# Altium PCB ECG.PcbDoc
Units mil, origin at the board's own origin, x right, y up, seen from the top; angles counter-clockwise.
Board outline 2530 x 835 mil, 2 copper layers (Top Layer, GND); 21 components, 19 nets, 64 pads, 2 vias.
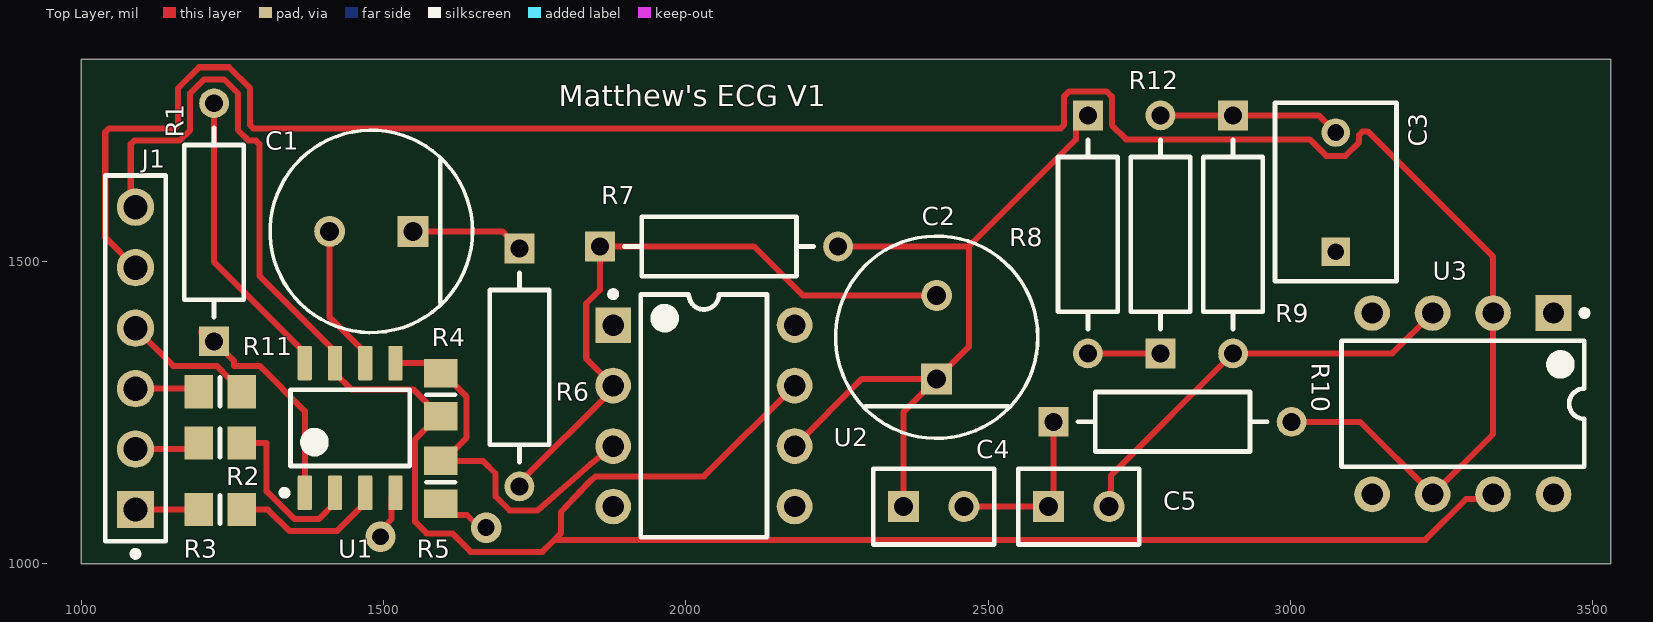
[diagram p0: Top Layer view]
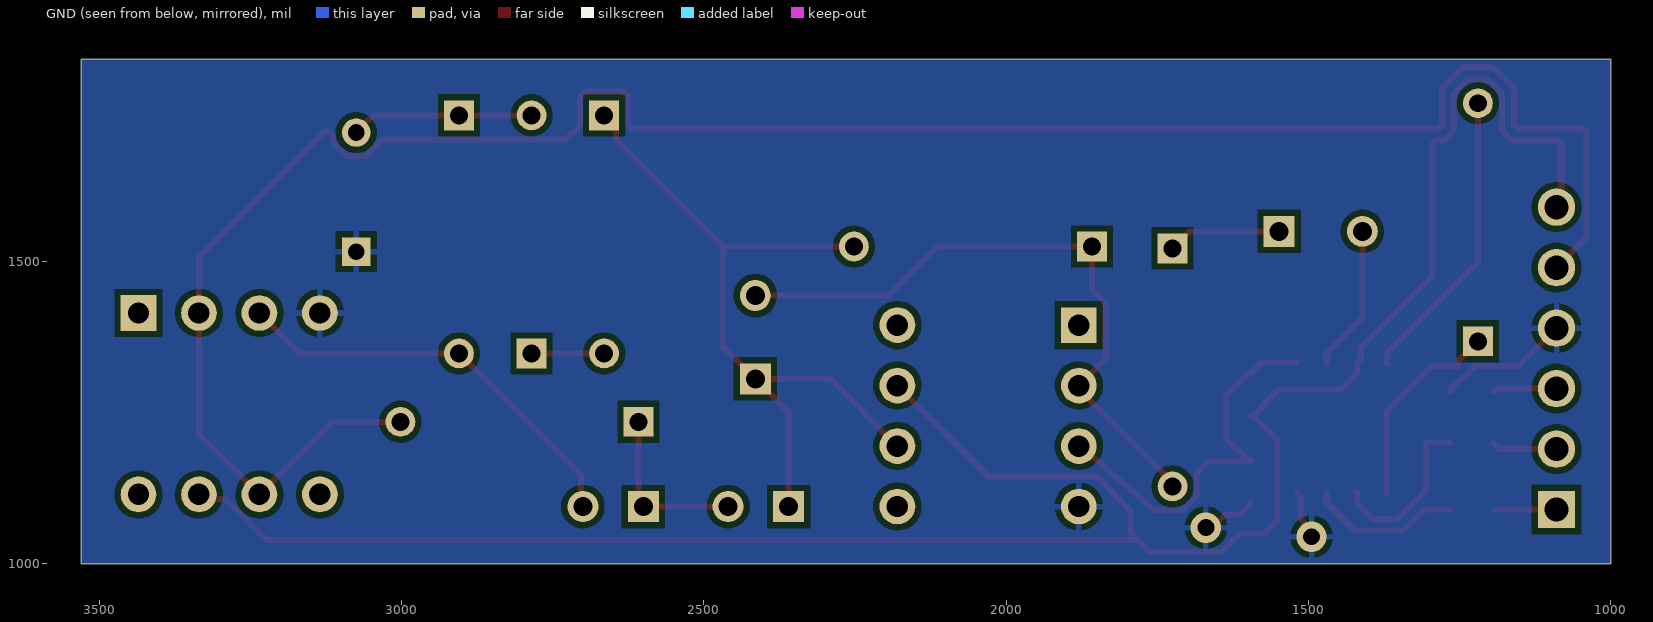
[diagram p1: GND view, seen from below]
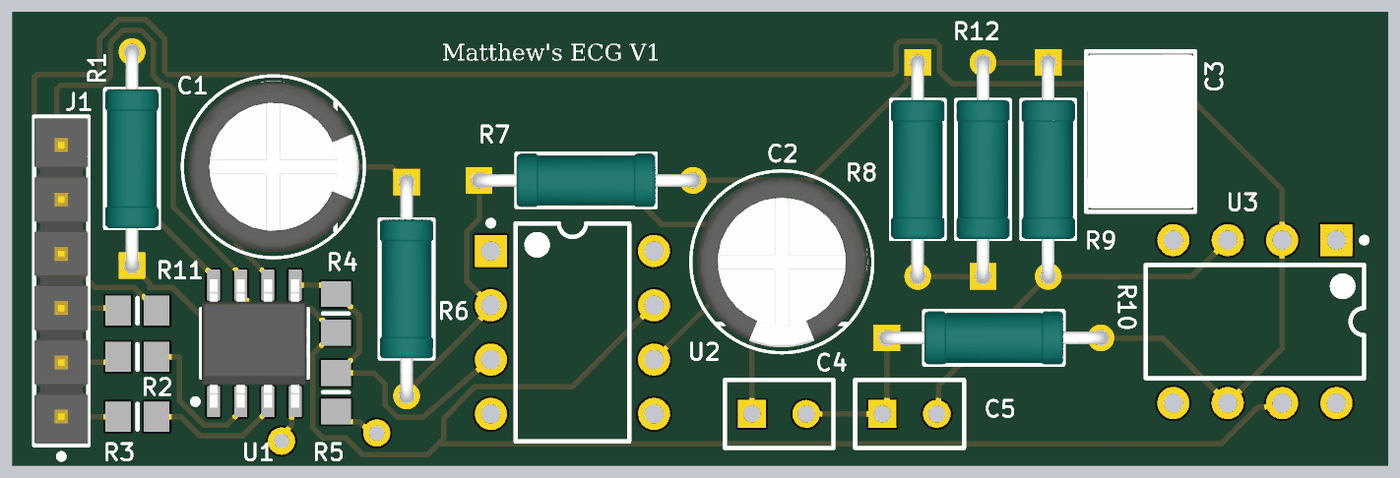
[diagram p2: 3D render of the assembled board from above, using the file's embedded part models]

## Layer stack, top to bottom
Top Solder: solder mask 0.4, Solder Resist, Dk 3.5
Top Layer: signal copper 1.4
Dielectric 1: dielectric 12.6, FR-4, Dk 4.8
GND: signal copper 1.4
Bottom Solder: solder mask 0.4, Solder Resist, Dk 3.5

## Board outline
1000,1000 3530,1000 3530,1835 1000,1835

## Design rules (kind name [scope] priority, off if disabled: settings)
Clearance [All] p1: gap=10 ignorepadtopadclearanceinfootprint=FALSE except(0: Arc-Hole Track-Hole SMDPad-Hole THPad-Hole Via-Hole Fill-Hole Poly-Hole Region-Hole Text-Hole)
PolygonConnect [All] p1: connectstyle=Relief reliefconductorwidth=10 reliefentries=4 polygonreliefangle="90 Angle" airgapwidth=10
RoutingVias [All] p1: holewidth=28 width=50 viastyle="Through Hole" minholewidth=28 minwidth=50 maxholewidth=28 maxwidth=50
SolderMaskExpansion [All] p1: expansion=4 istentingtop=FALSE
Width [All] p1: maxlimit=10 minlimit=10 preferedwidth=10
30 further rules are at their usual default settings.

## Components (designator, comment, footprint, x,y, rotation, side; value= is the part's Value field where it differs from the comment)
C1 "47u" FP-RAD-TH-D_8_0_5-L_20_2-MFG 1480,1550 r180 top
C2 "47u" FP-RAD-TH-D_8_0_5-L_20_2-MFG 2415,1375 r90 top
C3 "200n" FP-R82DC4100DQ60J-MFG 3075,1615 r90 top
C4 "100n" CAPR51-254-508X318X736 2410,1095 r0 top locked
C5 "100n" CAPR51-254-508X318X736 2650,1095 r0 top locked
J1 "HTSW-106-07-G-S" FP-HTSW-106-07-G-S-MFG 1090,1340 r90 top
R1 "2000" FP-MRS25-MFG 1220,1565 r90 top
R2 "Res 0805" 6-0805_N 1230,1200 r0 top value=100k
R3 "Res 0805" 6-0805_N 1230,1090 r0 top value=100k
R4 "Res 0805" 6-0805_N 1595,1280 r270 top value=10k
R5 "Res 0805" 6-0805_N 1595,1135 r90 top value=10k
R6 "100k" FP-MRS25-MFG 1725,1325 r270 top
R7 "100k" FP-MRS25-MFG 2055,1525 r0 top
R8 "1.655k" FP-MRS25-MFG 2665,1545 r270 top
R9 "424k" FP-MRS25-MFG 2905,1545 r270 top
R10 "1.655k" FP-MRS25-MFG 2805,1235 r0 top
R11 "Res 0805" 6-0805_N 1230,1285 r0 top value=100k
R12 "1.655k" FP-MRS25-MFG 2785,1545 r90 top
U1 "INA126UA/2K5" D0008A_N 1445,1225 r90 top
U2 "LM741CN" P0008A 2030,1245 r0 top locked
U3 "LM741CN/NOPB" P0008A 3285,1265 r270 top locked

## Footprints (in the part's own frame and the unit in brackets; to place one, negate y for a bottom-side part, rotate by r counter-clockwise, add the part's x,y. Pads: shape width x height; smd on the part's side, far side on the other; paste and mask are expansions set on the pad)
6-0805_N [mm]
  rect 1.2x1.4 smd: 1(-0.9,0) 2(0.9,0)
  silkscreen extent 0,-0.6 0,0.6, body extent -1.07,-0.7 1.07,0.7, height 0.7
CAPR51-254-508X318X736 [mm] "THD, 2-Leads, Body 5.08x3.18mm"
  rect 1.3x1.3 hole 0.8: 1(-1.27,0)
  round 1.3 hole 0.8: 2(1.27,0)
  silkscreen extent -2.54,-1.59 2.54,1.59, body extent -2.54,-1.59 2.54,1.59, height 7.36
D0008A_N [mm] "SOIC, 8-Leads, Body 5x4mm, Pitch 1.27mm, IPC Medium Density"
  rrect17% 1.45x0.6 smd: 1(-2.725,1.905) 2(-2.725,0.635) 3(-2.725,-0.635) 4(-2.725,-1.905) 5(2.725,-1.905) 6(2.725,-0.635) 7(2.725,0.635) 8(2.725,1.905)
  silkscreen extent -2.85,-2.5 1.6,2.88, body extent -3,-2.45 3,2.45, height 1.63
FP-HTSW-106-07-G-S-MFG [mm]
  rect 1.57x1.57 hole 1.02 paste-2539.97 mask+0: 1(-6.35,0)
  round 1.57 hole 1.02 paste-2539.97 mask+0: 2(-3.81,0) 3(-1.27,0) 4(1.27,0) 5(3.81,0) 6(6.35,0)
  silkscreen extent -8.33,-1.27 7.68,1.27, body extent -7.78,-1.37 7.78,1.37, height 0.25
FP-MRS25-MFG [mm]
  rect 1.25x1.25 hole 0.75 paste-2539.97 mask+0: 1(-5,0)
  round 1.25 hole 0.75 paste-2539.97 mask+0: 2(5,0)
  silkscreen extent -3.98,-1.25 3.98,1.25, body extent -5.72,-1.35 5.72,1.35, height 0.25
FP-R82DC4100DQ60J-MFG [mm]
  rect 1.2x1.2 hole 0.7 paste-2539.97 mask+0: 1(-2.5,0)
  round 1.2 hole 0.7 paste-2539.97 mask+0: 2(2.5,0)
  silkscreen extent -3.75,-2.55 3.75,2.55, body extent -3.85,-2.65 3.85,2.65, height 0.25
FP-RAD-TH-D_8_0_5-L_20_2-MFG [mm]
  rect 1.3x1.3 hole 0.8 paste-2539.97 mask+0: 1(-1.75,0)
  round 1.3 hole 0.8 paste-2539.97 mask+0: 2(1.75,0)
  silkscreen extent -4.25,-4.25 4.25,4.25, body extent -4.35,-4.35 4.35,4.35, height 0.25
P0008A [mm] "DIP, 8-Leads, Body 10.15x6.6mm, Pitch 2.54mm"
  rect 1.5x1.5 hole 0.9: 1(-3.81,3.81)
  round 1.5 hole 0.9: 2(-3.81,1.27) 3(-3.81,-1.27) 4(-3.81,-3.81) 5(3.81,-3.81) 6(3.81,-1.27) 7(3.81,1.27) 8(3.81,3.81)
  silkscreen extent -3.93,-5.1 2.65,5.23, body extent -3.95,-5.07 3.95,5.07, height 5.08

## Part data
C1 C2: library part CMP-05427-001204-1, "Aluminum Electrolytic Capacitors (Radial Lead Type) AEC-Q200 Qualified 270uF ±20% 35V"
C3: library part CMP-03022-000017-1, "CAP FILM 1UF 5% 63VDC RADIAL", Capacitance=1uF, Case/Package=Radial, Dielectric=PET, Insulation Resistance=30R, Max Operating Temperature=105°C, Min Operating Temperature=-55°C, Package Quantity=1700, Tolerance=5%, Voltage=63V, Voltage Rating (AC)=40V, Construction=RADIAL, Contact Plating=Tin, Depth=5mm, Dielectric Material=PET, Dissipation Factor=80%, Height - Seated (Max)=0.398inch, Lead Diameter=0.5mm, Lead Pitch=5mm, Length=7.2mm, Life (Hours)=2000Hour, Mount="Through Hole", Packaging="Tape and Reel", Radiation Hardening=No, REACH SVHC="No SVHC", RoHS Compliant=Yes, Series=R82, Termination=Radial, Type="General Purpose", Voltage Rating=63V, Voltage Rating (DC)=63V, Width=5mm
C4 C5: library part CMP-1664-00004-1, "Radial Leaded Multilayer Ceramic Capacitor, 0.1 uF, +/- 10%, 50 V, -55 to 125 degC, 2-Pin THD, RoHS, Tape and Reel", Case\Package=SOT-23-5, Dropout Voltage="260 mV", Max Input Voltage="8 V", Max Operating Temperature="85 degC", Max Power Dissipation="250 mW", Min Operating Temperature="-40 degC", Output Current="150 mA", Output Voltage="5 V", Package Quantity=3000, ComponentLink1Description="Manufacturer URL", ComponentLink1URL=http://www.kemet.com/, ComponentLink2Description=Datasheet, ComponentLink2URL=http://www.kemet.com/docfinder?Partnumber=C320C104K5R5TA, DatasheetVersion=Dec-15, Height="1.3 mm", Length="3 mm", Mount="Surface Mount", Outputs=1, PackageDescription="2-Pin Through Hole Device, Body 5.08 x 3.18 mm, Pitch 2.54 mm", PackageReference=CAPR51-254-508X318X736, Packaging="Tape and Reel", Pins=5, Radiation Hardening=No, RoHSCompliant=true, Width="1.8 mm"
J1: library part CMP-02766-001515-1, "CONN HEADER VERT 6POS 2.54MM", Color=Natural, Flammability Rating="UL94 V-0", Max Current Rating=7.6A, Max Operating Temperature=125°C, Max Voltage Rating (AC)=550V, Min Operating Temperature=-55°C, Connector Type=Header, Contact Finish - Mating=GOLD, Contact Material=Bronze, Contact Mating Length=0.23inch, Contact Plating=Gold, Contact Shape=Square, Contact Type="Male Pin", Depth=2.48mm, Fastening Type=Pull, Gender=Male, Housing Color=Natural, Housing Material=Polymer, Insulation Color=Natural, Insulation Material=Polymer, Lead Free="Lead Free", Length=15.24mm, Mount="Through Hole", Number of Contacts=6, Number of Positions=6, Number of Rows=1, Orientation=Straight, Packaging=Rail/Tube, Pitch=0.1inch, Radiation Hardening=No, REACH SVHC="No SVHC", RoHS Compliant=Yes, Series=HTSW, Termination=Solder
R1 R6 R7 R8 R9 R10 R12: library part CMP-00030-42757237-1, "MRS25000C1000FRP00 Resistor, 100 Ohm, ± 1%, 600 mW, Axial Leaded, Metal Film (Thin Film), Professional", Case/Package=Axial, Max Operating Temperature=155°C, Max Power Dissipation=600mW, Min Operating Temperature=-55°C, Resistance=100Ω, Temperature Coefficient=50ppm/°C, Tolerance=1%, Voltage Rating=350V, Composition="Metal Film, Thin Film", Contact Plating=Tin, Diameter=2.5mm, Lead Diameter=600µm, Lead Free="Lead Free", Length=6.5mm, Military Standard=Not, Mount="Through Hole", NexarPartId=42757237, Number of Pins=2, Number of Terminations=2, Packaging="Tape & Reel (TR)", Power Rating=600mW, Radiation Hardening=No, REACH SVHC=Unknown, RoHS=Compliant, Schedule B="8533210090, 8533210090", Termination=Axial, Voltage Rating (DC)=350V, Width=2.5mm
R2 R3 R4 R5 R11: library part CMP-009-00180-12, "Resistor", Case/Package=0805, Power=125mW, Component Type=Standard, Design Item ID=Res1, LatestRevisionDate=17-Jul-2002, LatestRevisionNote="Re-released for DXP Platform.", PackageReference=AXIAL-0.3, Pins=2, Published=8-Jun-2000, Publisher="Altium Limited", Source="PCB Footprint.SCHLIB"
U1: library part CMP-0992-00053-2, "Micropower Instrumentation Amplifier Single and Dual Versions, -40 to 85 degC, 8-pin SOIC (D8), Green (RoHS & no Sb/Br)", Input Bias Current (+/-)(Max)(nA)=50, Manufacturer="Texas Instruments", Quiescent Current (+/-)(Typ)(mA)=0.175, CMRR(Min)(dB)=74, Code_JEDEC=MS-012, ComponentLink1Description="Manufacturer URL", ComponentLink1URL=http://www.ti.com/, ComponentLink2Description=Datasheet, ComponentLink2URL=http://www.ti.com/general/docs/lit/getliterature.tsp?genericPartNumber=INA126&fileType=pdf, ComponentLink3Description="Package Specification", ComponentLink3URL=http://www.ti.com/litv/pdf/msoi002j, DatasheetVersion=SBOS062A, Eco-Plan="Green (RoHS & no Sb/Br)", Gain(V/V)="5 to 10000", Input Offset (+/-)(Max)(uV)=500, Input Offset Drift (+/-)(Max)(uV/Degrees Celsius)=5, Mounting Technology="Surface Mount", Noise at 1kHz(Typ)(nV/rt(Hz))=35, Non-Linearity (+/-)(Max)(%)=0.012, Number of Channels=1, PackageDescription="8-Pin Plastic Small Outline, Body 4.9 x 3.9 mm, Pitch 1.27 mm", PackageReference=D0008A, PackageVersion="4040047-3/M, 06/2011", PartNumber=INA126UA/2K5, SubFamily="Dual Supply", Vs(Max)(V)=36, Vs(Min)(V)=2.7
U2 U3: library part CMP-0055-00162-3, "Operational Amplifier, 8-pin MDIP, Pb-Free", Manufacturer="Texas Instruments", Package Reference=P0008A, PackageTopMarking=NSUZXYTTE#*LM*741CN, PowerWise=N, Code_JEDEC=MS-001-BA, ComponentLink1Description="Datasheet URL", ComponentLink1URL=http://www.ti.com/general/docs/lit/getliterature.tsp?genericPartNumber=LM741&fileType=pdf, CompType=Amplifiers, PackageDescription="MDIP, .365 x .250 x .130in, 8 Lead, .100in Pitch", PinCount=8, RoHS=Y

## Via types
v1: diameter 50, hole 28, Top Layer to GND, 2 vias

## Nets (pads, with @x,y where several pads share a name; then routed paths per layer and width w, separated by ;. In a path a pad name is that pad's centre, name@x,y a point inside that pad or via, vN(x,y) a via of type N, cw(c..) or ccw(c..) an arc to the next point about the centre after c; other vN are vias at no path point)
+5: J1.6 R4.2 U1.7 U2.7 U3.7 | length 3673.6
  Top Layer w10: J1.6 1082.18,1597.82 1082.18,1694.14 1088.04,1700 1162.82,1700 1180.39,1717.57 1180.39,1778.26 1203.59,1801.46 1236.41,1801.46 1259.61,1778.26 1259.61,1717.57 1277.18,1700 1289.14,1700 1295,1694.14 1295,1476.66 1413.19,1358.47 1413.19,1339.09 U1.7 1420,1315.55 1446.81,1288.74 1549.3,1288.74 1572.44,1265.6 1572.44,1263.19 R4.2@1591.06,1244.57 ; R4.2 R4.2@1591.06,1244.57 ; U2.7 2030,1145 1851.03,1145 1842.88,1137.78 ccw(c1872.33,1104.38) 1840,1135 1793.45,1085.91 1793.45,1050.47 1782.97,1040 ; U3.7 3327.5,1107.5 3290.47,1107.5 3222.97,1040 1782.97,1040 ; R4.2@1591.06,1244.57 1552.44,1205.94 1552.44,1069.73 1571.7,1050.47 1613.9,1050.47 1644.37,1020 1762.97,1020 1782.97,1040
ADC_Out: J1.5 R10.2 U3.2 U3.6 | length 3648.9
  Top Layer w10: J1.5 1040,1540 1040,1714.14 1045.86,1720 1154.54,1720 1160.39,1725.86 1160.39,1786.54 1195.31,1821.46 1244.69,1821.46 1279.61,1786.54 1279.61,1725.86 1285.46,1720 2619.54,1720 2625.39,1725.86 2625.39,1772.67 2634.18,1781.46 2695.82,1781.46 2704.61,1772.67 2704.61,1725.86 2728.22,1702.24 3031.56,1702.24 3059,1674.8 3091,1674.8 3113.62,1697.43 3113.62,1709.42 3119.48,1715.28 3127.76,1715.28 3335,1508.05 U3.2 3335,1215 U3.6 3115,1235 R10.2
GND: C3.1 J1.4 R5.1 R11.2 U1.4 U2.4 U3.4 | length 395.7
  Top Layer w10: J1.4 1152.44,1327.56 1224.4,1327.56 1244.4,1307.56 1246.81,1307.56 1265.43,1288.94 R11.2 ; v1(1495,1045) 1495,1055.82 1513.35,1074.17 1513.35,1111.07 U1.4 ; R5.1 1613.62,1080.94 1638.23,1080.94 1659.18,1060 v1(1670,1060)
LeftElectrode: J1.1 R3.1 | length 104.6
  Top Layer w10: J1.1 R3.1
NetC1_1: C1.1 R6.1 | length 187.8
  Top Layer w10: C1.1 1696.85,1550 R6.1
NetC1_2: C1.2 U1.6 | length 242.1
  Top Layer w10: C1.2 1411.1,1407.91 1470,1349.02 U1.6
NetC2_1: C2.1 C4.1 R7.2 R8.1 U2.6 | length 1270.5
  Top Layer w10: U2.6 2291.1,1306.1 C2.1 ; R7.2 2468.15,1525 ; C4.1 2360,1251.1 C2.1 ; R8.1 2645.39,1722.24 2645.39,1702.24 2468.15,1525 ; C2.1 2468.15,1359.25 2468.15,1525
NetC2_2: C2.2 R6.2 R7.1 U2.2 | length 1079.3
  Top Layer w10: R6.2 1725,1134.07 1880,1289.07 U2.2 1835.47,1339.53 1835.47,1430.74 1858.15,1453.42 R7.1 2112.97,1525 2194.07,1443.9 C2.2
NetC3_2: C3.2 R9.1 R12.2 | length 301.8
  Top Layer w10: R12.2 R9.1 3046.57,1741.85 C3.2
NetC4_2: C4.2 C5.1 R10.1 | length 283.4
  Top Layer w10: C4.2 C5.1 2608.15,1103.15 R10.1
NetC5_2: C5.2 R9.2 U3.3 | length 700.1
  Top Layer w10: C5.2@2700,1075 C5.2@2703.05,1078.05 ; C5.2 2703.05,1098.05 2703.05,1146.2 R9.2 3168.15,1348.15 U3.3
NetR1_1: R1.1 U1.1 | length 341.2
  Top Layer w10: R1.1@1199.57,1381.06 R1.1@1199.57,1385 ; R1.1 1253.07,1335.08 1253.07,1327.56 1295.27,1327.56 1370,1252.83 U1.1
NetR1_2: R1.2 U1.8 | length 491.7
  Top Layer w10: R1.2 1220,1499.02 1370,1349.02 U1.8
NetR2_2: R2.2 U1.2 | length 281.2
  Top Layer w10: R2.2 1307.03,1200 1307.03,1120.3 1353.15,1074.17 1393.19,1074.17 1420,1100.98 U1.2
NetR3_2: R3.2 U1.3 | length 255.5
  Top Layer w10: R3.2 1309.04,1090 1344.87,1054.17 1423.19,1054.17 1470,1100.98 U1.3
NetR4_1: R4.1 R5.2 U1.5 U2.3 | length 643.2
  Top Layer w10: U1.5 1578.15,1332.28 R4.1 1598.94,1315.43 1637.56,1276.81 1637.56,1209.06 R5.2@1598.94,1170.43 ; R5.2 1664.57,1170.43 1685.39,1149.61 1685.39,1111.74 1708.59,1088.54 1746.46,1088.54 1754.74,1088.54 1842.75,1165 U2.3
NetR8_2: R8.2 R12.1 | length 120
  Top Layer w10: R8.2 R12.1
RightElectrode: J1.2 R2.1 | length 108.7
  Top Layer w10: J1.2 1184.57,1190 R2.1
RightLegInput: J1.3 R11.1 | length 106.6
  Top Layer w10: J1.3 1189.57,1290 R11.1
pads on no net: U2.1 U2.5 U2.8 U3.1 U3.5 U3.8

## Polygon pours and split planes (outlines as drawn)
GND on GND "GND_L02_P000" (solid, remove dead copper, pour order 0): 1000,1835 1000,1000 3530,1000 3530,1835

## Silkscreen, mask and mechanical layers (free items; w line width, h text height)
Top Overlay:
  text "Matthew's ECG V1" at 1790,1745.72 h60